# Altium PCB Patch65mm.PcbDoc
Units mil, origin at the board's own origin, x right, y up, seen from the top; angles counter-clockwise.
Board outline 3149.61 x 3149.61 mil, 2 copper layers (Top Layer, Bottom Layer); 18 components, 7 nets, 51 pads, 4 vias.
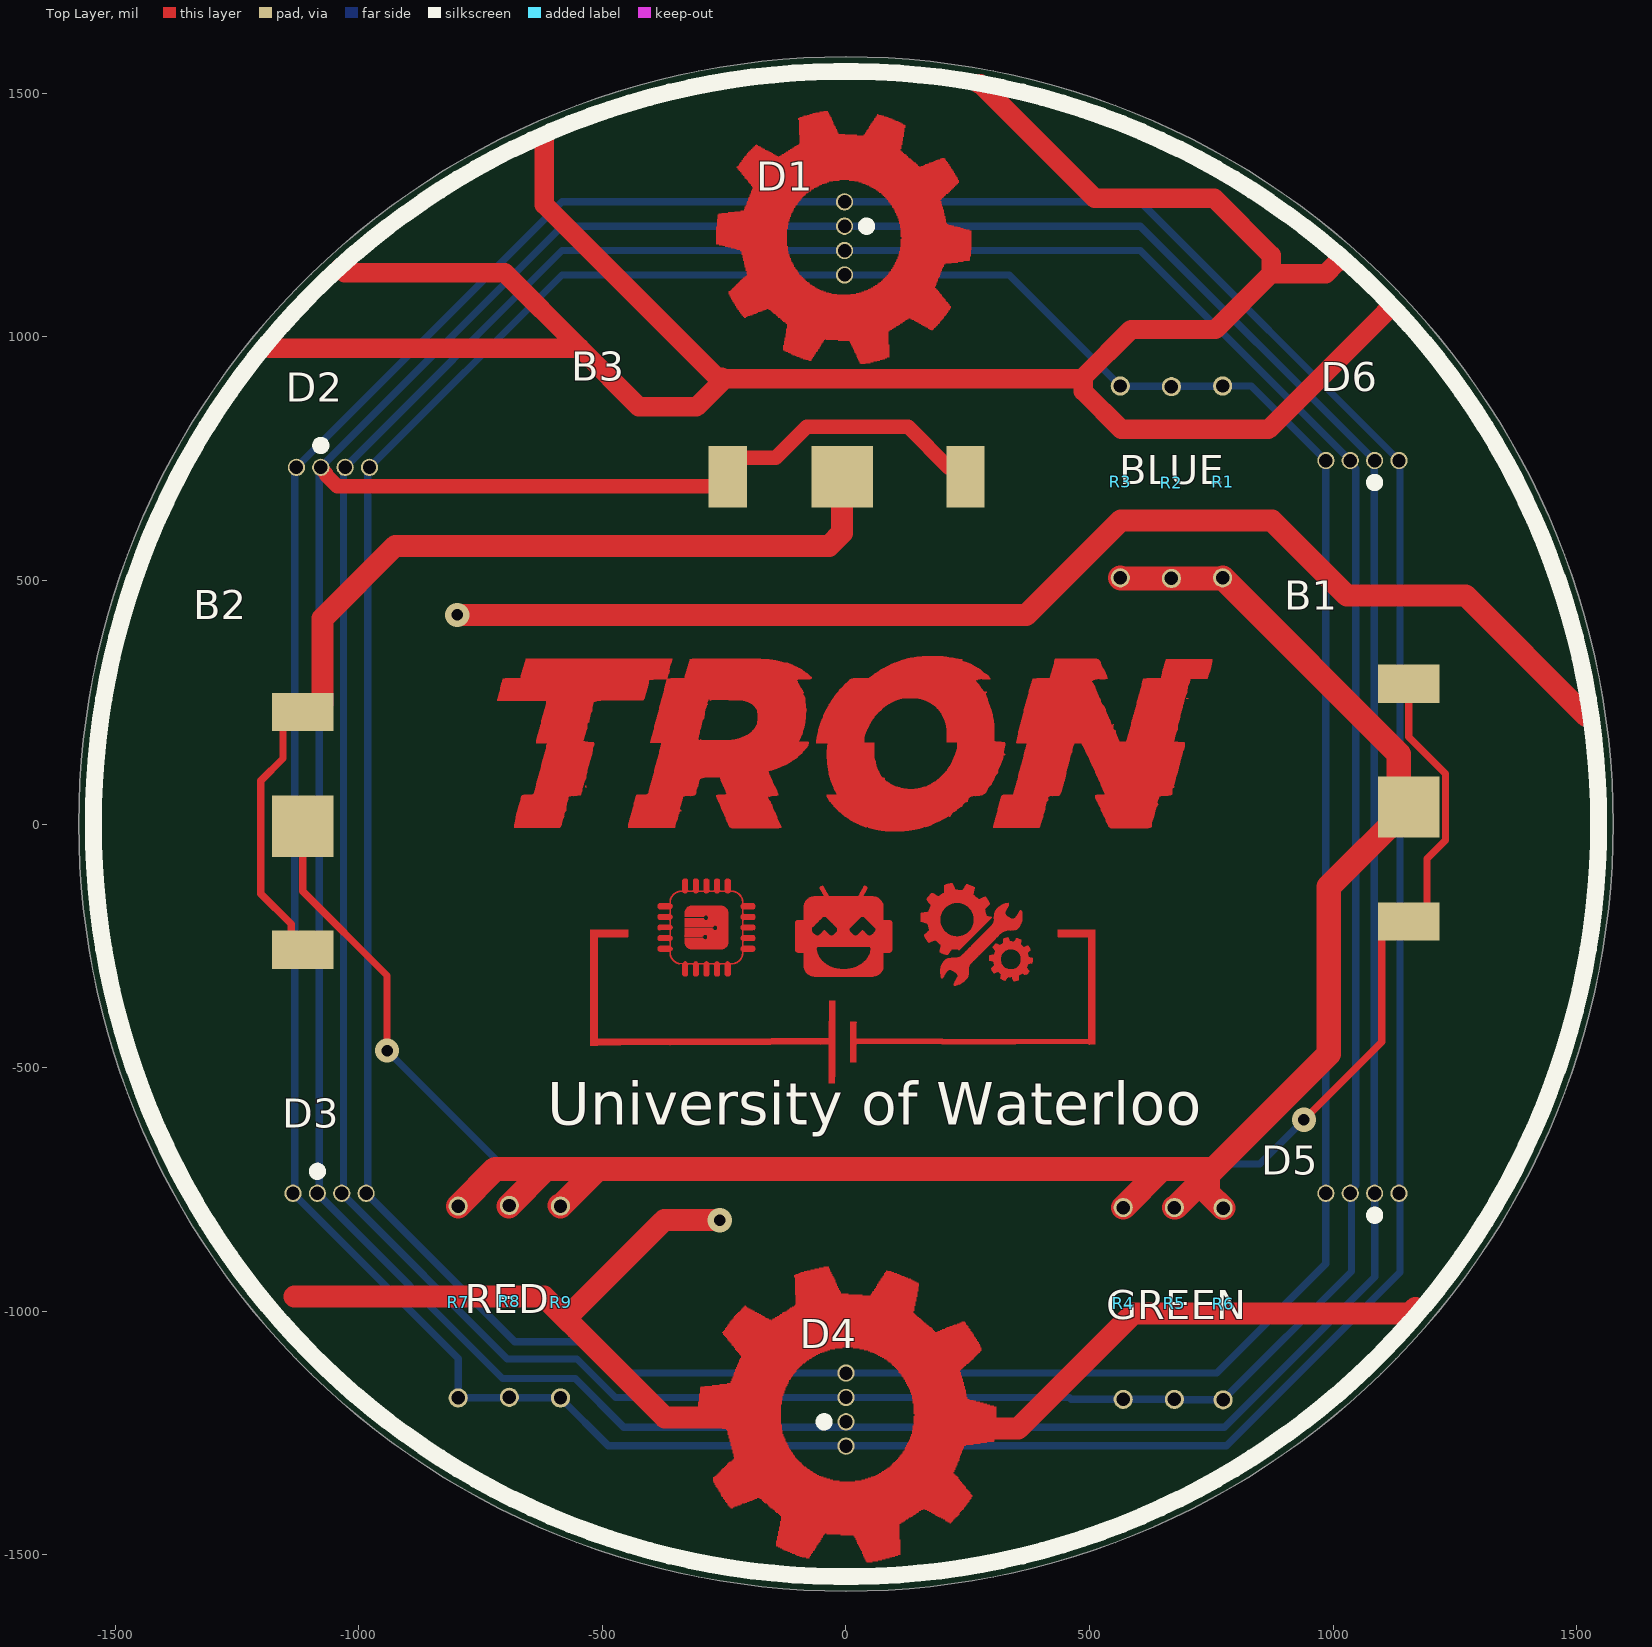
[diagram p0: Top Layer view]
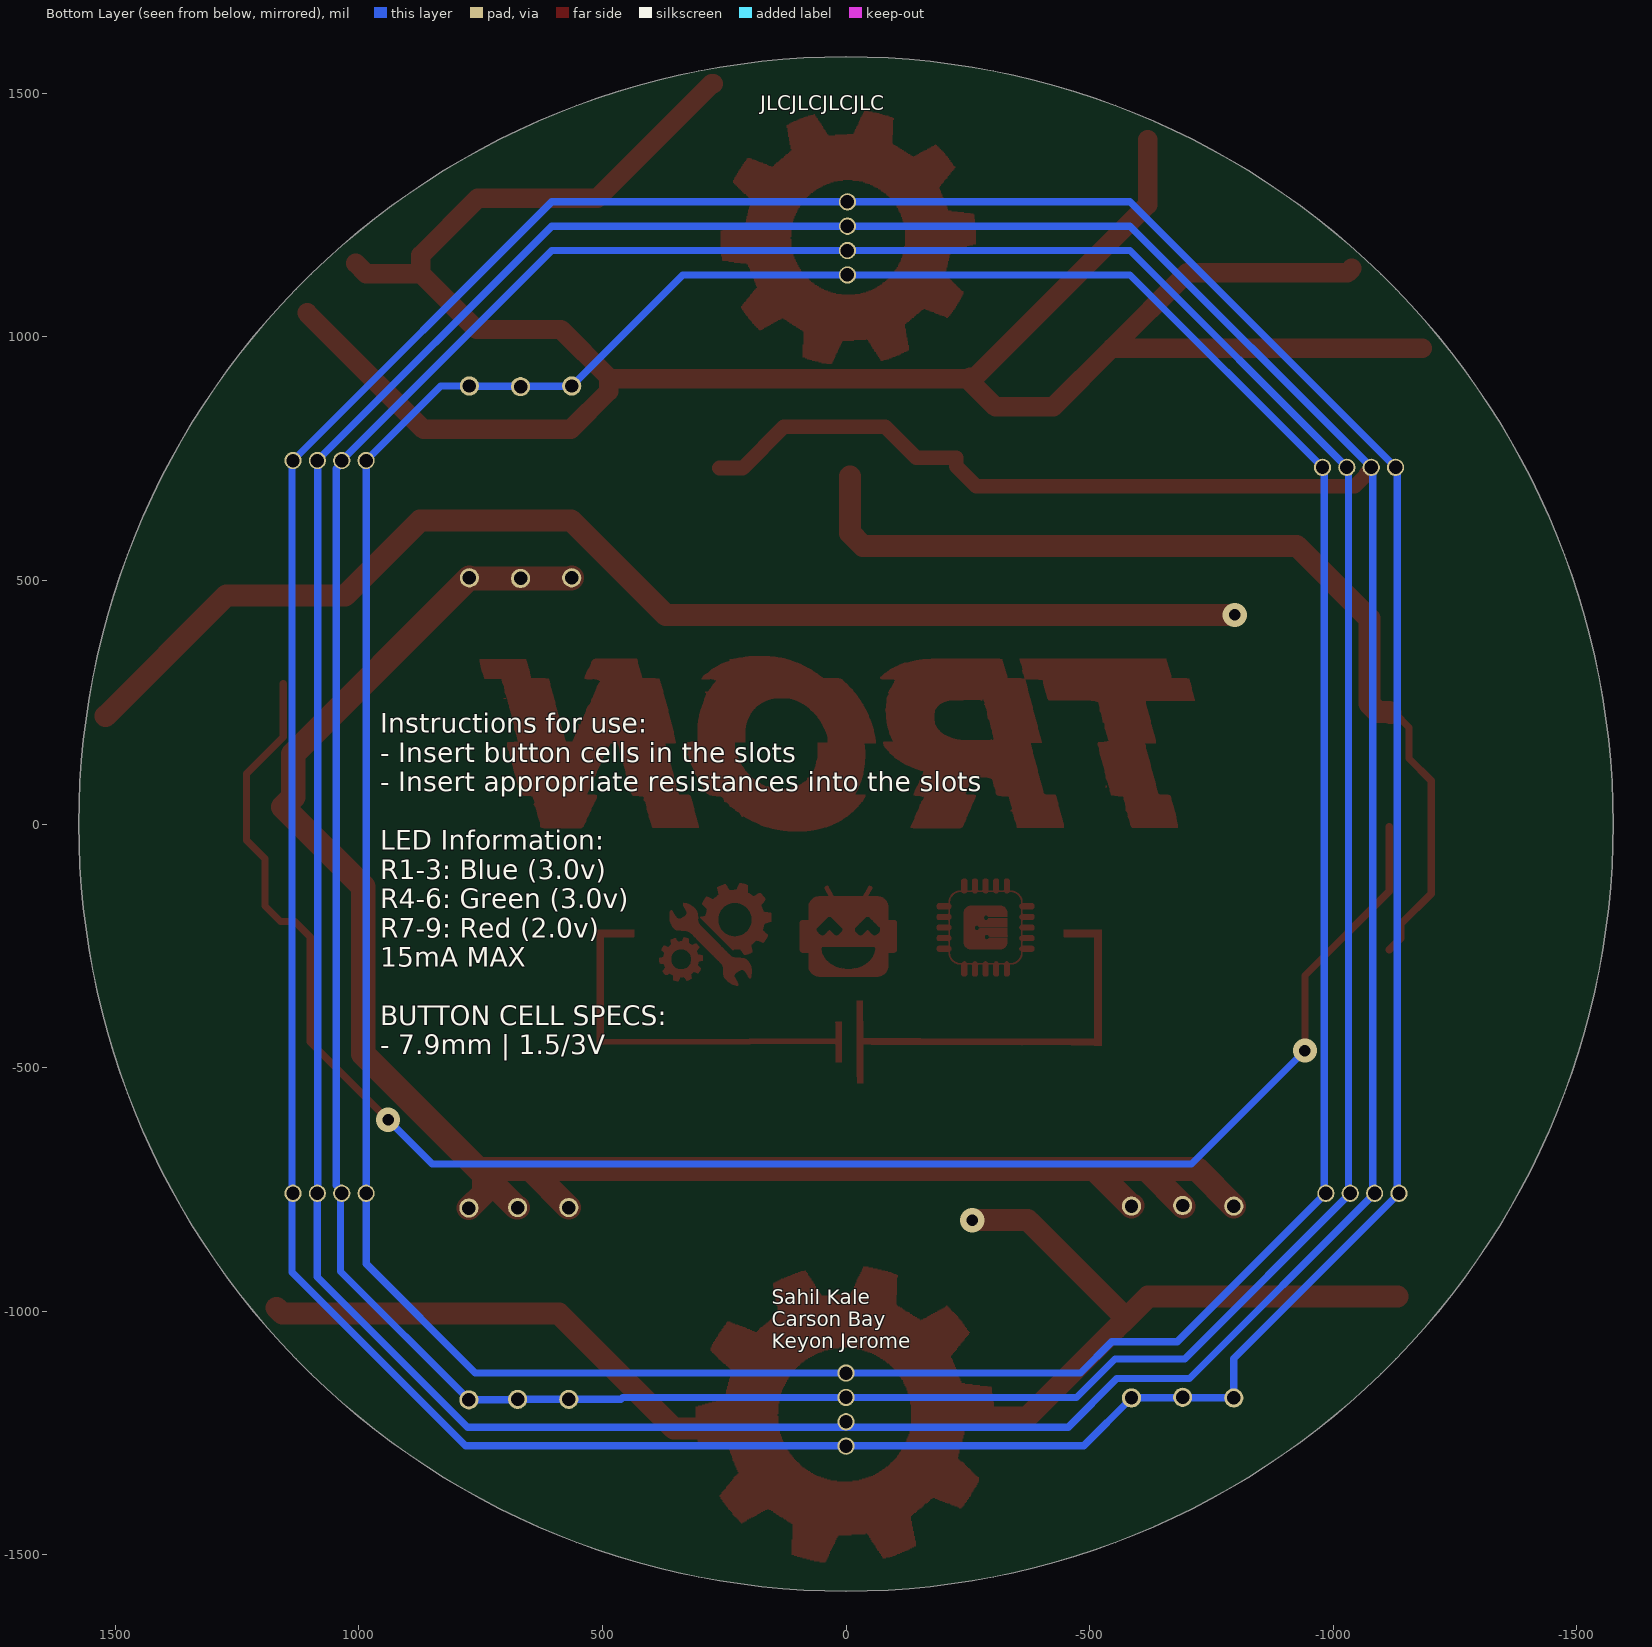
[diagram p1: Bottom Layer view, seen from below]
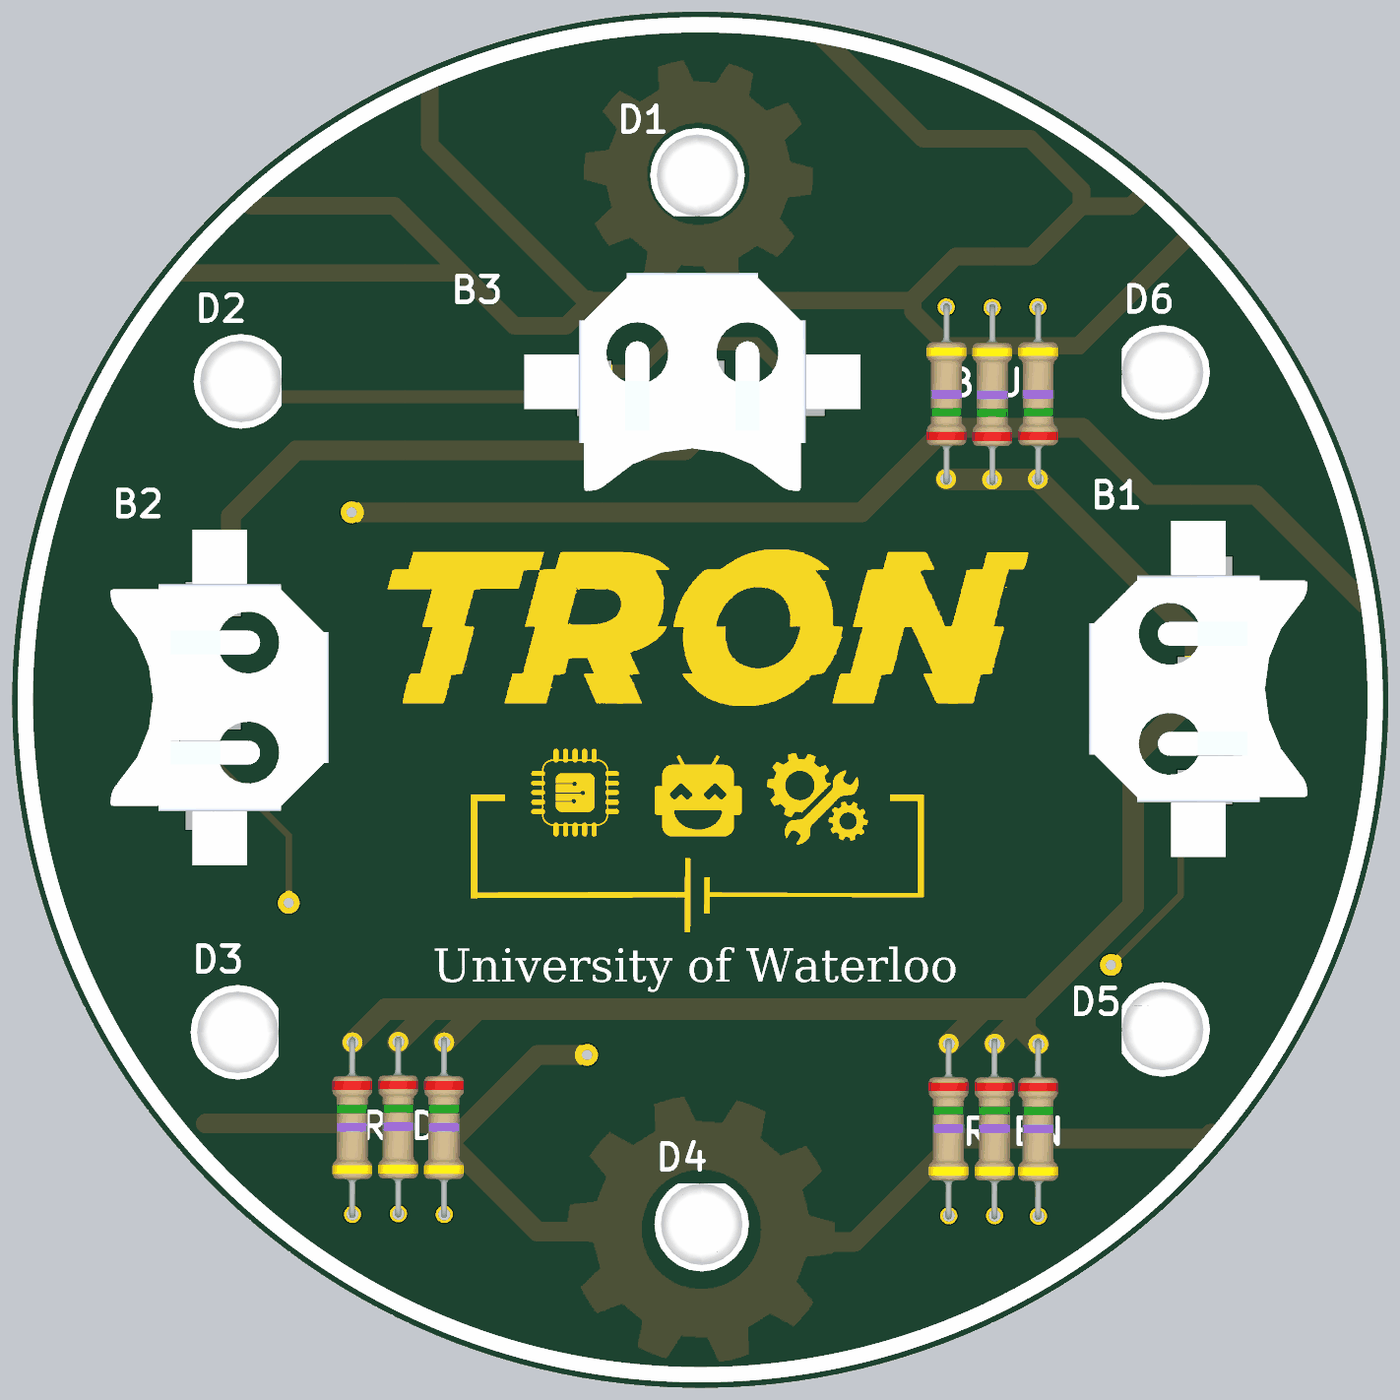
[diagram p2: 3D render of the assembled board from above, using the file's embedded part models]

## Layer stack, top to bottom
Top Solder: solder mask 0.4, Solder Resist, Dk 3.5
Top Layer: signal copper 1.4
Dielectric 1: dielectric 12.6, FR-4, Dk 4.8
Bottom Layer: signal copper 1.4
Bottom Solder: solder mask 0.4, Solder Resist, Dk 3.5

## Board outline
-1574.8,0 ccw(c0,0) 0,-1574.8 ccw(c0,0) 1574.8,0 ccw(c0,0) 0,1574.8 ccw(c0,0)

## Design rules (kind name [scope] priority, off if disabled: settings)
BoardOutlineClearance [All] p1: gap=7.87 ignorepadtopadclearanceinfootprint=FALSE
Clearance [All] p1: gap=5 ignorepadtopadclearanceinfootprint=FALSE except(9.84: Arc-Hole Track-Hole SMDPad-Hole THPad-Hole Via-Hole Fill-Hole Poly-Hole Region-Hole Text-Hole)
ComponentClearance [All] p1: gap=5 collisioncheckmode=3 verticalgap=5 showdistances=TRUE
DiffPairsRouting [All] p1: maxlimit=10 minlimit=5 mostfreqgap=5 toplayer_minwidth=5 toplayer_maxwidth=1000 toplayer_prefwidth=5 bottomlayer_minwidth=5 bottomlayer_maxwidth=1000 bottomlayer_prefwidth=5 maxuncoupledlength=500
Height [All] p1: minheight=0 maxheight=71497.94 prefheight=500
HoleSize [All] p1: absolutevalues=TRUE maxlimit=248.03 minlimit=11.81 maxpercent=80.000 minpercent=20.000
HoleToHoleClearance [All] p1: gap=9.84 allowstackedmicrovias=FALSE
MinimumAnnularRing [All] p1: minimumring=3
MinimumSolderMaskSliver [All] p1: minsoldermaskwidth=0
PlaneClearance [All] p1: clearance=5
PlaneConnect PlaneConnectPowerPads [InPadClass('PowerPads')] p1: planeconnectstyle=Direct reliefexpansion=20 reliefentries=4 reliefconductorwidth=10 reliefairgap=10
PlaneConnect [All] p2: pad.planeconnectstyle=Relief pad.reliefexpansion=11.81 pad.reliefentries=4 pad.reliefconductorwidth=5 pad.reliefairgap=5 via.planeconnectstyle=Direct via.reliefexpansion=11.81 via.reliefentries=4 via.reliefconductorwidth=5 via.reliefairgap=5
PolygonConnect PolygonConnectPowerPads [All vs (InPadClass('PowerPads'))] p1: connectstyle=Direct reliefconductorwidth=10 reliefentries=4 polygonreliefangle="90 Angle" airgapwidth=10
PolygonConnect [All] p2: thpad.connectstyle=Relief thpad.reliefconductorwidth=5 thpad.reliefentries=4 thpad.polygonreliefangle="90 Angle" thpad.airgapwidth=5 smdpad.connectstyle=Relief smdpad.reliefconductorwidth=5 smdpad.reliefentries=4 smdpad.polygonreliefangle="90 Angle" smdpad.airgapwidth=5 via.connectstyle=Direct via.reliefconductorwidth=5 via.reliefentries=4 via.polygonreliefangle="90 Angle" via.airgapwidth=5
RoutingVias [All] p1: holewidth=11.81 width=23.62 viastyle="Through Hole" minholewidth=11.81 minwidth=23.62 maxholewidth=23.62 maxwidth=259.84
SilkToSilkClearance [All] p1: silktosilkclearance=0
SilkToSolderMaskClearance [IsPad] p1: minsilkscreentomaskgap=5 clearancetoexposedcopper=TRUE
SolderMaskExpansion [All] p1: expansion=2.95 istentingtop=FALSE
Width [All] p1: maxlimit=1000 minlimit=5 preferedwidth=5 minimp=50.000000 maximp=50.000000 favimp=50.000000
20 further rules are at their usual default settings.

## Components (designator, comment, footprint, x,y, rotation, side; value= is the part's Value field where it differs from the comment)
B1 "7.9mm BAT" 2988 1155,-200 r90 top
B2 "7.9mm BAT" 2988 -1115,230 r270 top
B3 "7.9mm BAT" 2988 -243,713 r0 top
D1 "Tri Colour RGB LED" RGB_LED_THRUHOLE -3,1277 r270 top
D2 "Tri Colour RGB LED" RGB_LED_THRUHOLE -1128,732 r0 top
D3 "Tri Colour RGB LED" RGB_LED_THRUHOLE -1135,-758 r0 top
D4 "Tri Colour RGB LED" RGB_LED_THRUHOLE 0,-1277 r90 top
D5 "Tri Colour RGB LED" RGB_LED_THRUHOLE 1135,-758 r180 top
D6 "Tri Colour RGB LED" RGB_LED_THRUHOLE 1135,746 r180 top
R1 "?Ω" "Generic ThroughHole" 773,505.3 r90 top
R2 "?Ω" "Generic ThroughHole" 668,504 r90 top
R3 "?Ω" "Generic ThroughHole" 563,505.3 r90 top
R4 "?Ω" "Generic ThroughHole" 569,-787.3 r270 top
R5 "?Ω" "Generic ThroughHole" 674,-787.3 r270 top
R6 "?Ω" "Generic ThroughHole" 774,-788.3 r270 top
R7 "?Ω" "Generic ThroughHole" -796,-784.3 r270 top
R8 "?Ω" "Generic ThroughHole" -691,-783 r270 top
R9 "?Ω" "Generic ThroughHole" -586,-784.3 r270 top

## Footprints (in the part's own frame and the unit in brackets; to place one, negate y for a bottom-side part, rotate by r counter-clockwise, add the part's x,y. Pads: shape width x height; smd on the part's side, far side on the other; paste and mask are expansions set on the pad)
2988 [mm]
  rect 2x3.2 smd: 1(0,0) 1(12.4,0)
  rect 3.2x3.2 smd: 2(5.969,0)
  body extent -4.06,-5.97 15.49,6.73, height 3.17
"Generic ThroughHole" [mm]
  round 1 hole 0.7: 1(0,0) 2(10,0)
  body extent -0.3,-1.17 10.21,1.14, height 2.51
RGB_LED_THRUHOLE [mm]
  round 0.9 hole 0.7: 1(0,0) 2(2.54,0) 3(3.81,0) 4(1.27,0)
  silkscreen extent 1.07,0.94 1.47,1.34, body extent -0.81,-2.83 4.32,2.67, height 11.6

## Part data
B1 B2 B3: library part "CCELL HOLDER 7.9MM", "KEYSTONE         2988            BATTERY CONTACT, 7.9MM HEAR AID CELL, SURFACE MT", Manufacturer="Keystone Electronics", Manufacturer Part Number=2988, Supplier Part Number 1=36-2988-ND, Category="Batteries and Accessories", ComponentLink1Description=https://datasheet.ciiva.com/4642/m60p6-29374-4642672.pdf?src-supplier=Mouser, ComponentLink1URL=https://datasheet.ciiva.com/4642/m60p6-29374-4642672.pdf?src-supplier=Mouser, ComponentLink2Description=https://datasheet.ciiva.com/4/2988-4524.pdf?src-supplier=Digi-Key, ComponentLink2URL=https://datasheet.ciiva.com/4/2988-4524.pdf?src-supplier=Digi-Key, ComponentLink3Description=https://datasheet.ciiva.com/1390/1726104-1390366.pdf?src-supplier=Element14, ComponentLink3URL=https://datasheet.ciiva.com/1390/1726104-1390366.pdf?src-supplier=Element14, Pricing 1="1=0.39000, 25=0.35440, 100=0.34690, 250=0.32528, 500=0.28920 (USD)", RoHS=Yes, Stock 1=1523, Supplier 1=Digi-Key
D1 D2 D3 D4 D5 D6: library part LED_RGB_THRUHOLE, Supplier Link=https://www.amazon.com/Tricolor-Multicolor-Lighting-Electronics-Components/dp/B01C19ENDM
R1 R2 R3 R4 R5 R6 R7 R8 R9: library part "GENERIC - RES", "Generic Through Hole Resistor"

## Via types
v1: diameter 50, hole 23.62, Top Layer to Bottom Layer, 4 vias

## Nets (pads, with @x,y where several pads share a name; then routed paths per layer and width w, separated by ;. In a path a pad name is that pad's centre, name@x,y a point inside that pad or via, vN(x,y) a via of type N, cw(c..) or ccw(c..) an arc to the next point about the centre after c; other vN are vias at no path point)
4V5: B1.2 R1.1 R2.1 R3.1 R4.1 R5.1 R6.1 R7.1 R8.1 R9.1 | length 3872.6
  Top Layer w50: R7.1 -719.7,-708 -616,-708 ; R8.1@-692.3,-784.3 -616,-708 ; R9.1@-587.3,-783 R9.1 -509.7,-708 ; R3.1 564.3,504 R2.1 771.7,504 R1.1 1134.6,143.7 1134.6,55.4 B1.2 991,-129 991,-472 743,-720 743,-757.3 R6.1 ; R4.1 648.3,-708 ; R5.1 675.7,-787.3 755,-708 648.3,-708 ; -616,-708 -509.7,-708 ; -509.7,-708 648.3,-708
BLUE: D1.3 D2.3 D3.3 D4.3 D5.3 D6.3 R1.2 R2.2 R3.2 | length 7643
  Bottom Layer w15: D3.3 -680,-1063 -545.43,-1063 -481.43,-1127 D4.3 760.87,-1127 985,-902.87 D6.3 832,899 R1.2 772.35,898.35 668.65,898.35 R2.2 667.35,898.35 563.65,898.35 R3.2 335,1127 D1.3 -583,1127 D2.3 -981.5,728.5 -981.5,-754.5 D3.3
GND: B3.1 D1.4 D2.4 D3.4 D4.4 D5.4 D6.4 | length 9685.4
  Top Layer w30: D2.4 -1078,730.53 -1066.62,719.15 -1066.62,716 -1044,693.38 -267.37,693.38 -226.62,734.13 -226.62,751.82 -143.81,751.82 -80.63,815 128,815 212.39,730.61 B3.1@259.58,730.61
  Bottom Layer w15: D3.4 -705,-1138 -556,-1138 -456,-1238 461,-1238 777,-1238 1085,-930 D5.4 1084,-757 1084,745 D6.4 604,1227 D1.4 -583,1227 D2.4 -1081.5,728.5 -1081.5,-754.5 D3.4
GREEN: D1.2 D2.2 D3.2 D4.2 D5.2 D6.2 R4.2 R5.2 R6.2 | length 7949.6
  Bottom Layer w15: D5.2 1035,-752.47 1046,-741.47 1046,729.47 1035,740.47 D6.2 604,1177 D1.2 -583,1177 D2.2 -1031.5,728.5 -1031.5,-754.5 D3.2 -695,-1098 -552,-1098 -473,-1177 D4.2 458.28,-1177 462.28,-1181 R4.2 R5.2 674.5,-1181.5 773.5,-1181.5 R6.2 1037.54,-918.46 D5.2@1037.54,-758
NetB1_1: B1.1 B2.2 | length 3611.8
  Top Layer w15: B2.2 -1115,-138.15 -942,-311.15 v1(-942,-465) ; v1(940,-607) 1099.51,-447.49 1099.51,-231.87 1131.38,-200 1160.63,-200 1192.5,-168.13 1192.5,-71.16 1230.49,-33.17 1230.49,103.17 1155,178.66 B1.1@1155,288.19
  Bottom Layer w15: v1(-942,-465) -709,-698 849,-698 v1(940,-607)
NetB2_1: B2.1 B3.2 | length 2041.4
  Top Layer w15: B2.1@-1117.49,227.51 -1126.11,227.51 -1155.49,198.13 -1155.49,134.51 -1201,89 -1201,-143 -1138.89,-205.11 -1138.89,-234.29 B2.1@-1115,-258.19
  Top Layer w45: B2.1@-1117.49,227.51 -1115,230 -1091.38,230 -1074.51,246.87 -1074.51,421.49 -925,571 -34.74,571 -8.38,597.36 -8.38,712.62 B3.2
RED: D1.1 D2.1 D3.1 D4.1 D5.1 D6.1 R7.2 R8.2 R9.2 | length 8552.1
  Bottom Layer w15: D6.1 604,1277 D1.1 -583,1277 D2.1 -1131.5,728.5 -1131.5,-754.5 D3.1 -796,-1097 R7.2 -795.35,-1177.35 -691.65,-1177.35 R8.2 -690.35,-1177.35 -586.65,-1177.35 R9.2 -488,-1276 781,-1276 1137,-920 D6.1@1137,748
copper on no net: | length 10232.4
  Top Layer w40: -1183,977 -547,977 ; -1038.39,1140.39 -1029,1131 -700,1131 -546.5,977.5 -425,856 -387.14,856 -307.14,856 -250.57,912.57 -255,917 ; -619,1404 -619,1271 -265,917 ; -252,914 -250.57,914 472.61,914 484,914 ; 272,1519 276,1519 511,1284 756,1284 872.86,1167.14 872.86,1129.86 ; 1006,1151 984.86,1129.86 872.86,1129.86 ; 1106,1049 867,810 696.2,810 565.22,810 487,888.22 487,917 585,1015 758,1015 872.86,1129.86
  Top Layer w45: -1132,-970 -620,-970 -575,-1015 ; v1(-798,429) 370,429 564,623 874,623 898.98,598.02 1028,469 1272,469 1519.62,221.38 ; v1(-259,-813) -373,-813 -377,-817 -575,-1015 ; -166,-1218 -372,-1218 -553,-1037 -575,-1015 ; 192,-1241 353,-1241 589,-1005 1157,-1005 1169,-993

## Other copper
Top Layer:
  drawing of 16 lines, arcs and shapes, not listed

## Silkscreen, mask and mechanical layers (free items; w line width, h text height)
Top Overlay:
  circle w35: c0,0 r1545
  text "BLUE" at 561,697 h60
  text "University of Waterloo" at -612.8,-645.61 h150
  text "RED" at -783,-1004 h60
  text "GREEN" at 534,-1017 h60
Bottom Overlay:
  text "JLCJLCJLCJLC" at 176,1465 h30
  text "Instructions for use: / - Insert button cells in the slots / - Insert appropriate resistances into the slots /  / LED Information: / R1-3: Blue (3.0v) / R4-6: Green (3.0v) / R7-9: Red (2.0v) / 15mA MAX /  / BUTTON CELL SPECS: / - 7.9mm | 1.5/3V" at 956,-473 h40
  text "Sahil Kale / Carson Bay / Keyon Jerome" at 152,-1076 h30
Top Solder:
  drawing of 14 lines, arcs and shapes, not listed